# EAGLE board pr0board_spacer (EAGLE 9.6.2)
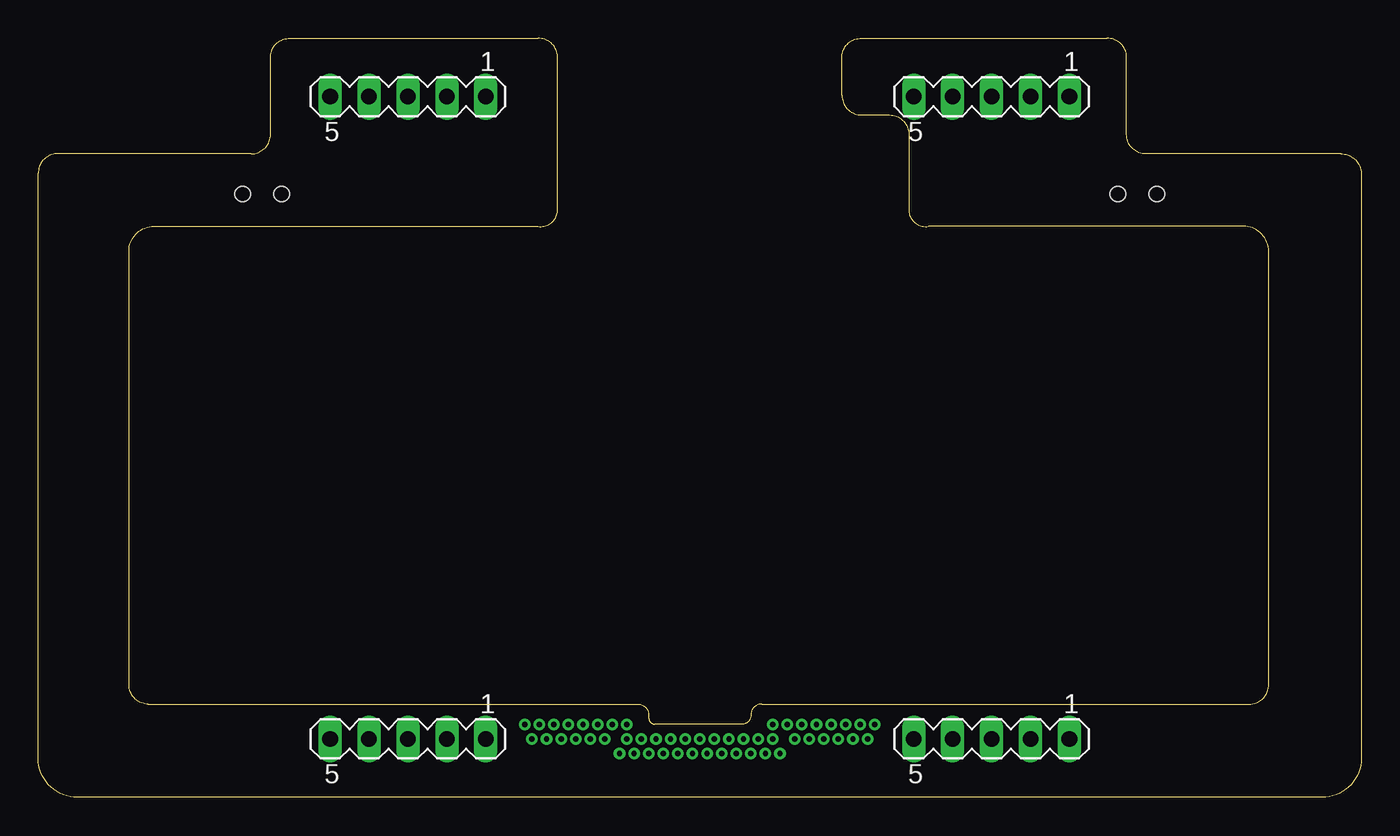
[diagram p0: board, top side]

Size 86.36 x 49.53 mm. Coordinates in mm from the lower left corner, seen from the top.
Outline: 2.54,0 arc-90 0,2.54
Outline: 86.36,2.54 arc-90 83.82,0
Outline: 0,2.54 0,40.72 arc-90 1.19,41.99 13.89,41.99 arc90 15.16,43.26 15.16,48.34 arc-90 16.43,49.53 32.62,49.53 arc-90 33.89,48.34 33.89,38.18 arc-90 32.62,37.26 7.54,37.26 arc90 5.92,35.64 5.92,7.35 arc90 7.19,6.08 39.13,6.08 arc-90 39.85,5.4 39.85,5.24 arc90 40.24,4.76 45.96,4.76 arc90 46.51,5.4 arc-90 47.23,6.08 79.05,6.08 arc90 80.32,7.35 80.32,35.64 arc90 78.66,37.26 58.1,37.26 arc-90 56.83,38.18 56.83,43.26 arc90 55.56,44.53 53.74,44.53 arc-90 52.47,45.8 52.47,48.34 arc-90 53.74,49.53 69.77,49.53 arc-90 71.04,48.34 71.04,43.26 arc90 72.31,41.99 85.01,41.99 arc-90 86.36,40.72 86.36,2.54
Outline: 83.82,0 2.54,0
Outline: 2.54,0 arc-90 0,2.54
Outline: 86.36,2.54 arc-90 83.82,0
Copper layers (1*16): Top 0.035mm / dielectric 1.5mm / Bottom 0.035mm
Design rules "default *": minimum track width 6mil, minimum drill 0.35mm, track to track 6mil, track to pad 6mil, pad to pad 6mil, via to via 6mil, smd to smd 6mil, copper to edge 10mil, drill to drill 6mil, minimum pad ring 10mil, minimum via ring 8mil, stop-mask expansion 4mil, vias tented up to drill 0mil, thermal gap 10mil
Holes 1 mm at 13.33,39.37 15.88,39.37 70.49,39.37 73.02,39.37

## Footprints (pad centres in the part's own frame; a part is rotated, then mirrored left to right if it is on the bottom)
MA05-1 = drill 1.016 long: 1 -5.08,0; 2 -2.54,0; 3 0,0; 4 2.54,0; 5 5.08,0

## Placement (x,y rotation side)
SV1  210-81-05GB01  [MA05-1]  24.13,45.72 180 top
SV3  [MA05-1]  24.13,3.81 180 top
SV6  [MA05-1]  62.23,45.72 180 top
SV8  [MA05-1]  62.23,3.81 180 top

## Library data of the parts
SV1 SV3 SV6 SV8 = con-lstb; OC_FARNELL: unknown; OC_NEWARK: unknown

## Nets
GND1: SV3.1
KEY_S_1: SV1.3
KEY_S_2: SV1.2
KEY_S_5: SV3.4
KEY_S_6: SV3.3
WS2812BDI: SV1.5
WS2812BDO1: SV8.1

## Tracks (layer width: path | path; a pad name or v marks a point on that pad's centre or on a via)
S$1  (via drill 0.35)
  other vias: 43.18,3.81
S$2  (via drill 0.35)
  other vias: 44.13,3.81
S$3  (via drill 0.35)
  other vias: 45.09,3.81
S$4  (via drill 0.35)
  other vias: 46.04,3.81
S$5  (via drill 0.35)
  other vias: 42.23,3.81
S$6  (via drill 0.35)
  other vias: 41.27,3.81
S$7  (via drill 0.35)
  other vias: 40.32,3.81
S$8  (via drill 0.35)
  other vias: 39.37,3.81
S$9  (via drill 0.35)
  other vias: 46.99,3.81
S$10  (via drill 0.35)
  other vias: 47.94,3.81
S$11  (via drill 0.35)
  other vias: 47.94,4.76
S$12  (via drill 0.35)
  other vias: 38.42,3.81
S$13  (via drill 0.35)
  other vias: 38.42,4.76
S$14  (via drill 0.35)
  other vias: 37.47,4.76
S$15  (via drill 0.35)
  other vias: 36.51,4.76
S$16  (via drill 0.35)
  other vias: 35.56,4.76
S$17  (via drill 0.35)
  other vias: 34.61,4.76
S$18  (via drill 0.35)
  other vias: 33.66,4.76
S$19  (via drill 0.35)
  other vias: 32.7,4.76
S$20  (via drill 0.35)
  other vias: 31.75,4.76
S$21  (via drill 0.35)
  other vias: 48.9,4.76
S$22  (via drill 0.35)
  other vias: 49.85,4.76
S$23  (via drill 0.35)
  other vias: 50.8,4.76
S$24  (via drill 0.35)
  other vias: 51.75,4.76
S$25  (via drill 0.35)
  other vias: 52.7,4.76
S$26  (via drill 0.35)
  other vias: 53.66,4.76
S$27  (via drill 0.35)
  other vias: 54.61,4.76
S$28  (via drill 0.35)
  other vias: 38.89,2.86
S$29  (via drill 0.35)
  other vias: 39.85,2.86
S$30  (via drill 0.35)
  other vias: 40.8,2.86
S$31  (via drill 0.35)
  other vias: 41.75,2.86
S$32  (via drill 0.35)
  other vias: 42.7,2.86
S$33  (via drill 0.35)
  other vias: 43.66,2.86
S$34  (via drill 0.35)
  other vias: 44.61,2.86
S$35  (via drill 0.35)
  other vias: 45.56,2.86
S$36  (via drill 0.35)
  other vias: 46.51,2.86
S$37  (via drill 0.35)
  other vias: 47.47,2.86
S$38  (via drill 0.35)
  other vias: 37.94,2.86
S$39  (via drill 0.35)
  other vias: 48.42,2.86
S$40  (via drill 0.35)
  other vias: 36.99,3.81
S$41  (via drill 0.35)
  other vias: 36.04,3.81
S$42  (via drill 0.35)
  other vias: 35.08,3.81
S$43  (via drill 0.35)
  other vias: 34.13,3.81
S$44  (via drill 0.35)
  other vias: 33.18,3.81
S$45  (via drill 0.35)
  other vias: 32.23,3.81
S$46  (via drill 0.35)
  other vias: 49.37,3.81
S$47  (via drill 0.35)
  other vias: 50.32,3.81
S$48  (via drill 0.35)
  other vias: 51.28,3.81
S$49  (via drill 0.35)
  other vias: 52.23,3.81
S$50  (via drill 0.35)
  other vias: 53.18,3.81
S$51  (via drill 0.35)
  other vias: 54.13,3.81